# Altium PCB AUTOMATIC_WATER_PUMPS_V1.PcbDoc
Units mm, origin at the board's own origin, x right, y up, seen from the top; angles counter-clockwise.
Board outline 60.96 x 87.63 mm, 2 copper layers (Top Layer, Bottom Layer); 65 components, 65 nets, 234 pads, 0 vias.
Unrouted connection lines stored in the file: 151.
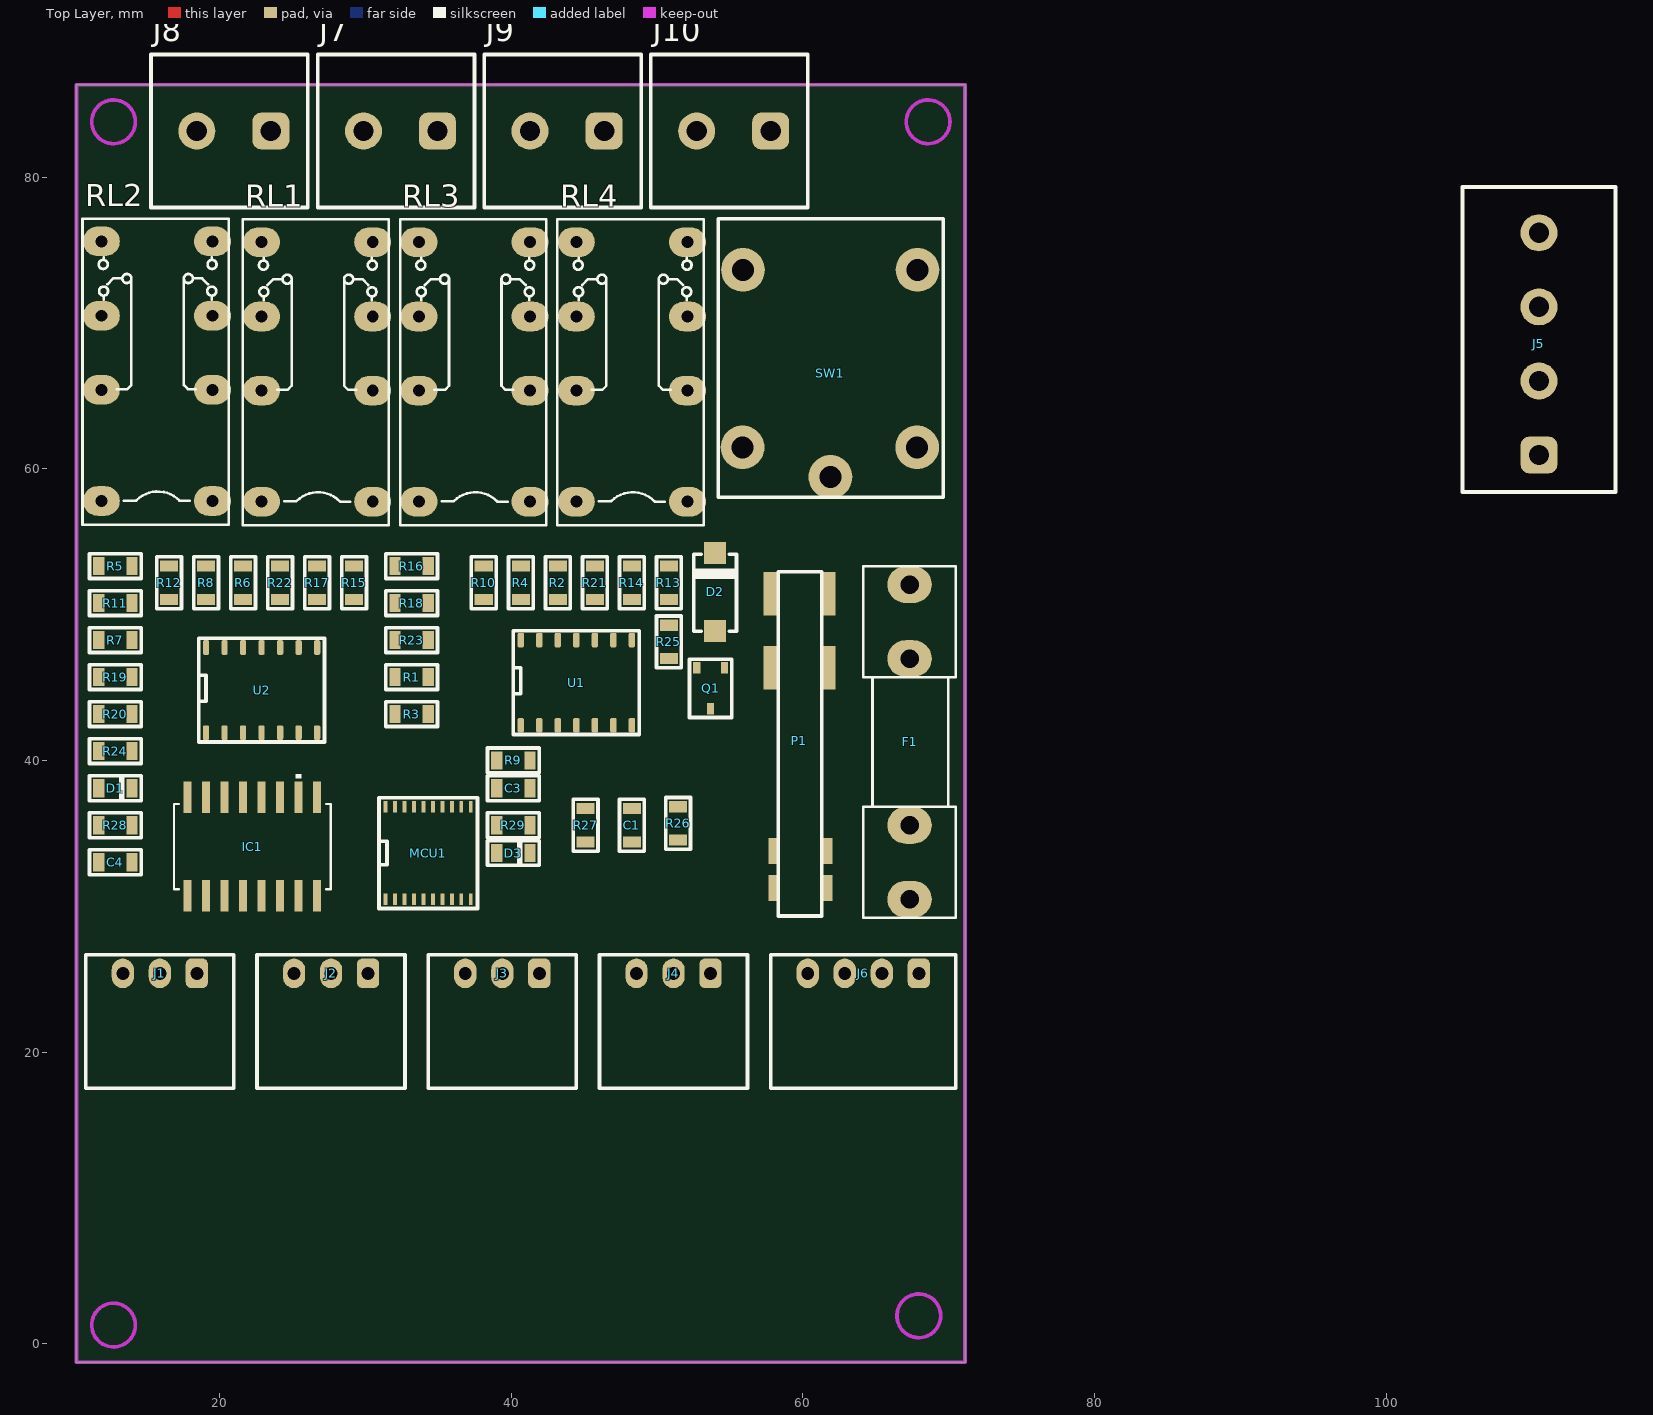
[diagram p0: Top Layer view]
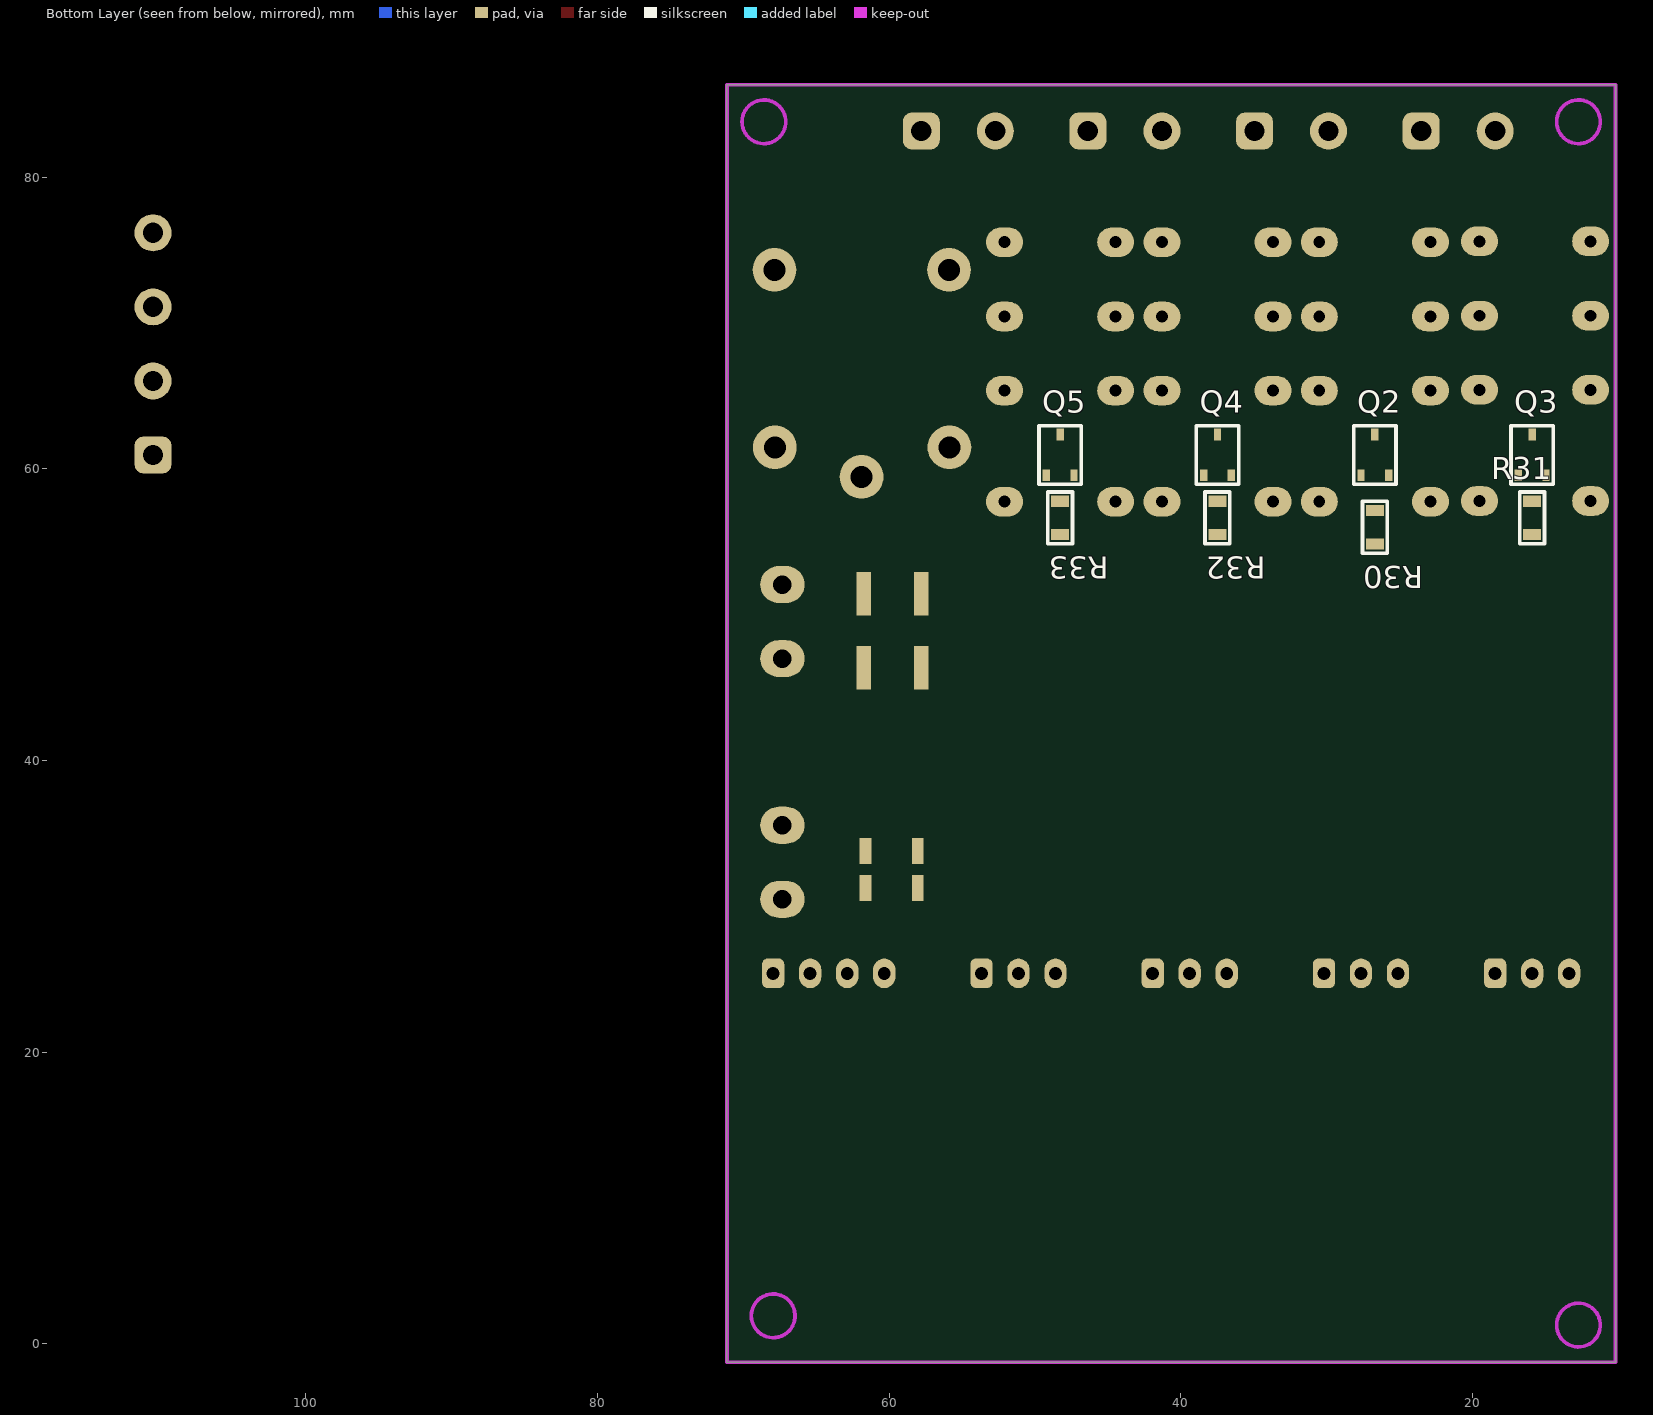
[diagram p1: Bottom Layer view, seen from below]

## Layer stack, top to bottom
Top Solder: solder mask 0.0102, Solder Resist, Dk 3.5
Top Layer: signal copper 0.0356
Dielectric 1: dielectric 0.32, FR-4, Dk 4.8
Bottom Layer: signal copper 0.0356
Bottom Solder: solder mask 0.0102, Solder Resist, Dk 3.5

## Board outline
10.16,-1.27 10.16,86.36 71.12,86.36 71.12,-1.27

## Design rules (kind name [scope] priority, off if disabled: settings)
Clearance [All] p1: gap=0.254 ignorepadtopadclearanceinfootprint=FALSE except(0: Arc-Hole Track-Hole SMDPad-Hole THPad-Hole Via-Hole Fill-Hole Poly-Hole Region-Hole Text-Hole)
PolygonConnect [All] p1: connectstyle=Relief reliefconductorwidth=0.254 reliefentries=4 polygonreliefangle="90 Angle" airgapwidth=0.254
RoutingCorners [All] p1: cornerstyle=Round minsetback=2.54 maxsetback=2.54
RoutingVias [All] p1: holewidth=0.3 width=0.5 viastyle="Through Hole" minholewidth=0.3 minwidth=0.5 maxholewidth=0.3 maxwidth=0.5
SolderMaskExpansion [All] p1: expansion=0.102 istentingtop=FALSE
Width [All] p1: maxlimit=0.2 minlimit=0.2 preferedwidth=0.2
29 further rules are at their usual default settings.

## Components (designator, comment, footprint, x,y, rotation, side; value= is the part's Value field where it differs from the comment)
C1 "102pF" C0805 48.26,35.56 r270 top
C3 "105" C0805 40.132,38.1 r0 top
C4 "103" C0805 12.827,33.02 r0 top
D1 "Blink" L0805RED 12.827,38.1 r0 top
D2 "1N4007" DO-214AC(SMA) 53.975,53.467 r270 top
D3 "Blink" L0805RED 40.132,33.655 r0 top
F1 "Fuse 1" FUSE2 67.485,41.075 r90 top
IC1 "74LS151" SOP16 22.225,34.087 r90 top
J1 "WT1" "JST - XH - Thru (R) - 3Pin - 2.54mm" 15.875,25.4 r180 top
J2 "WT2" "JST - XH - Thru (R) - 3Pin - 2.54mm" 27.622,25.4 r180 top
J3 "WT3" "JST - XH - Thru (R) - 3Pin - 2.54mm" 39.37,25.4 r180 top
J4 "WT4" "JST - XH - Thru (R) - 3Pin - 2.54mm" 51.117,25.4 r180 top
J5 "KF28" HEADER_KF128_4_5.08MM 110.49,68.58 r90 top
J6 "LCD16x2" "JST - XH - Thru (R) - 4Pin - 2.54mm" 64.135,25.4 r180 top
J7 "KF28_2" HEADER_KF128_2_5.08MM 32.385,83.185 r180 top
J8 "KF28_2" HEADER_KF128_2_5.08MM 20.955,83.185 r180 top
J9 "KF28_2" HEADER_KF128_2_5.08MM 43.815,83.185 r180 top
J10 "KF28_2" HEADER_KF128_2_5.08MM 55.245,83.185 r180 top
MCU1 "STM8S003F3P6" TSSOP20_0.65_4.4 34.29,33.655 r90 top
P1 "MODULE_5V_700mA" MODULE_5V_700mA 59.817,46.355 r90 top
Q1 "2N3904" SOT23-3 53.66,44.955 r180 top
Q2 "2N3904" SOT23-3 26.67,60.96 r180 bottom
Q3 "2N3904" SOT23-3 15.875,60.96 r180 bottom
Q4 "2N3904" SOT23-3 37.465,60.96 r180 bottom
Q5 "2N3904" SOT23-3 48.26,60.96 r180 bottom
R1 "10k" R0805 33.147,45.72 r180 top
R2 "10k" R0805 43.18,52.197 r90 top
R3 "10k" R0805 33.147,43.18 r0 top
R4 "10k" R0805 40.64,52.197 r270 top
R5 "10k" R0805 12.827,53.34 r180 top
R6 "10k" R0805 21.59,52.197 r90 top
R7 "10k" R0805 12.827,48.26 r0 top
R8 "10k" R0805 19.05,52.197 r270 top
R9 "10k" R0805 40.132,40.005 r180 top
R10 "10k" R0805 38.1,52.197 r90 top
R11 "10k" R0805 12.827,50.8 r180 top
R12 "10k" R0805 16.51,52.197 r90 top
R13 "10k" R0805 50.8,52.197 r90 top
R14 "10k" R0805 48.26,52.197 r270 top
R15 "10k" R0805 29.21,52.197 r90 top
R16 "10k" R0805 33.147,53.34 r180 top
R17 "10k" R0805 26.67,52.197 r270 top
R18 "10k" R0805 33.147,50.8 r0 top
R19 "10k" R0805 12.827,45.72 r180 top
R20 "10k" R0805 12.827,43.18 r0 top
R21 "10k" R0805 45.72,52.197 r90 top
R22 "10k" R0805 24.13,52.197 r90 top
R23 "10k" R0805 33.147,48.26 r180 top
R24 "10k" R0805 12.827,40.64 r180 top
R25 "10k" R0805 50.8,48.133 r270 top
R26 "10k" R0805 51.435,35.687 r90 top
R27 "10k" R0805 45.085,35.56 r270 top
R28 "10k" R0805 12.827,35.56 r0 top
R29 "10k" R0805 40.132,35.56 r0 top
R30 "10k" R0805 26.67,56.007 r270 bottom
R31 "10k" R0805 15.875,56.642 r270 bottom
R32 "10k" R0805 37.465,56.642 r270 bottom
R33 "10k" R0805 48.26,56.642 r270 bottom
RL1 "RELAY_DPDT_1A" RELAY_DPDT_1A 26.869,66.628 r90 top
RL2 "RELAY_DPDT_1A" RELAY_DPDT_1A 15.875,66.675 r90 top
RL3 "RELAY_DPDT_1A" RELAY_DPDT_1A 37.664,66.628 r90 top
RL4 "RELAY_DPDT_1A" RELAY_DPDT_1A 48.459,66.628 r90 top
SW1 "RELAY_10A" RELAY_10A_5PIN 61.755,67.71 r90 top
U1 "LM324" SOP-14 44.45,45.339 r90 top
U2 "LM324" SOP-14 22.86,44.831 r90 top

## Footprints (in the part's own frame and the unit in brackets; to place one, negate y for a bottom-side part, rotate by r counter-clockwise, add the part's x,y. Pads: shape width x height; smd on the part's side, far side on the other; paste and mask are expansions set on the pad)
C0805 [mil]
  rect 30x48.82 smd: 1(-45,0) 2(45,0)
  silkscreen extent -70,-33 70,33, body extent -39,-24 39,24, height 39
DO-214AC(SMA) [mm]
  rect 1.5x1.5 smd: 1(4.572,0) 2(-0.762,0)
  silkscreen extent -0.67,-1.5 4.61,1.5, body extent -0.67,-1.46 4.61,1.46, height 2.41
FUSE2 [mm]
  oval 2.54x3.048 hole 1.27: 1(-10.595,0.175) 1(-5.515,0.175) 2(5.915,0.175) 2(10.995,0.175)
  silkscreen extent -11.87,-3 12.26,3.35, body extent -11.18,-2.8 11.86,3.4, height 9.6
HEADER_KF128_2_5.08MM [mil]
  rrect50% 100x100 hole 55: 1(-100,0)
  round 100 hole 55: 2(100,0)
  silkscreen extent -200,-207 224,207, body extent -200,-207 224,207, height 563
HEADER_KF128_4_5.08MM [mil]
  rrect50% 100x100 hole 55: 1(-300,0)
  round 100 hole 55: 2(-100,0) 3(100,0) 4(300,0)
  silkscreen extent -400,-207 424,207, body extent -400,-207 424,207, height 563
"JST - XH - Thru (R) - 3Pin - 2.54mm" [mil]
  rrect50% 60x80 hole 35: 1(-100,0)
  oval 60x80 hole 35: 2(0,0) 3(100,0)
  silkscreen extent -200,-50 200,310, body extent -192,-13 192,304, height 230
"JST - XH - Thru (R) - 4Pin - 2.54mm" [mil]
  rrect50% 60x80 hole 35: 1(-150,0)
  oval 60x80 hole 35: 2(-50,0) 3(50,0) 4(150,0)
  silkscreen extent -250,-50 250,310, body extent -242,-13 242,304, height 230
L0805RED [mil]
  rect 30x48.82 smd: 1(-45,0) 2(45,0)
  silkscreen extent -70,-35 70,35, body extent -39,-25 39,25, height 43
MODULE_5V_700mA [mm]
  rect 1.779x0.8 all layers, no hole: 0(-15.108,1.8) 0(-12.568,1.8) 3(-12.568,-1.8) 4(-15.108,-1.8)
  rect 3x1 all layers, no hole: 0(0,2.032) 0(5.08,2.032) 1(5.08,-1.905) 2(0,-1.905)
  silkscreen extent -17.02,-1.48 6.6,1.52
R0805 [mil]
  rect 30x48.82 smd: 1(-45,0) 2(45,0)
  silkscreen extent -70,-33 70,33, body extent -39,-25 40,25, height 18
RELAY_10A_5PIN [mm]
  round 3 hole 1.5: 1(-6.225,5.9) 2(-8.25,-0.125) 3(-6.225,-6.075) 4(5.95,-6.1) 5(5.95,5.875)
  silkscreen extent -9.65,-7.87 9.45,7.58, body extent -9.65,-7.88 9.45,7.62, height 15.3
RELAY_DPDT_1A [mil]
  oval 80x100 hole 32: 1(150.87,157.83) 2(-49.13,157.83) 3(351.87,157.83) 4(150.87,-142.17) 5(-49.13,-142.17) 6(351.87,-142.17) 7(-349.13,-142.17) 8(-349.13,157.83)
  silkscreen extent -413,-186 413,209, body extent -409,-182 410,204, height 484
SOP16 [mil]
  rect 85x22 smd paste+0 mask+0: 1(-133,175) 2(-133,125) 3(-133,75) 4(-133,25) 5(-133,-25) 6(-133,-75) 7(-133,-125) 8(-133,-175) 9(133,-175) 10(133,-125) 11(133,-75) 12(133,-25) 13(133,25) 14(133,75) 15(133,125) 16(133,175)
  silkscreen extent -115,-212 196,212, body extent -161,-206 162,206, height 79
SOP-14 [mm]
  rrect50% 1x0.43 smd: 1(-2.921,3.81) 2(-2.921,2.54) 3(-2.921,1.27) 4(-2.921,0) 5(-2.921,-1.27) 6(-2.921,-2.54) 7(-2.921,-3.81) 8(2.921,-3.81) 9(2.921,-2.54) 10(2.921,-1.27) 11(2.921,0) 12(2.921,1.27) 13(2.921,2.54) 14(2.921,3.81)
  silkscreen extent -3.56,-4.32 3.56,4.32, body extent -3,-4.28 3,4.28, height 1.8
SOT23-3 [mm]
  rect 0.5x0.8 smd: 1(-0.95,-1.4) 2(0.95,-1.4) 3(0,1.4)
  silkscreen extent -1.45,-2 1.45,2, body extent -1.45,-1.4 1.45,1.4, height 1.3
TSSOP20_0.65_4.4 [mil]
  rect 30x10 smd: 1(-125,115.16) 2(-125,89.57) 3(-125,63.98) 4(-125,38.39) 5(-125,12.8) 6(-125,-12.8) 7(-125,-38.39) 8(-125,-63.98) 9(-125,-89.57) 10(-125,-115.16) 11(125,-115.16) 12(125,-89.57) 13(125,-63.98) 14(125,-38.39) 15(125,-12.8) 16(125,12.8) 17(125,38.39) 18(125,63.98) 19(125,89.57) 20(125,115.16)
  silkscreen extent -150,-133 150,133, body extent -124,-128 124,128, height 43

## Part data
C1: library part Capacitors(SMD)
C3 C4: library part C0805
D1 D3: library part LED0805
D2: library part "Diode 1N4007-DO214AC(SMA)"
IC1: "8-input multiplexer"
J1 J2 J3 J4: library part "JST - XH - Thru (R) - 3Pin - 2.54mm"
J5: library part HEADER_KF128_4_5.08MM
J6: library part "JST - XH - Thru (R) - 4Pin - 2.54mm"
J7 J8 J9 J10: library part HEADER_KF128_2_5.08MM
Q1 Q2 Q3 Q4 Q5: library part "2N3904 (SOT-23)"
R1 R2 R3 R4 R5 R6 R7 R8 R9 R10 R11 R12 R13 R14 R15 R16 R17 R18 R19 R20 R21 R22 R23 R24 R25 R26 R27 R28 R29 R30 R31 R32 R33: library part "Resistor SMD"
U1 U2: "Quad-Operational Amp"
F1: LatestRevisionDate=17-Jul-2002, LatestRevisionNote="Re-released for DXP Platform.", PackageDescription="Thru-Hole; 2 Leads", PackageReference=PIN-W2/E2.8, Published=8-Jun-2000, Publisher="Altium Limited"

## Nets (pads, with @x,y where several pads share a name; then routed paths per layer and width w, separated by ;. In a path a pad name is that pad's centre, name@x,y a point inside that pad or via, vN(x,y) a via of type N, cw(c..) or ccw(c..) an arc to the next point about the centre after c; other vN are vias at no path point)
AC1: J5.1 J5.3 P1.2 RL1.5 RL2.5 RL3.5 RL4.5
AC2: F1.1 P1.1 RL1.2 RL2.2 RL3.2 RL4.2 SW1.2
GND: C1.1 C3.2 C4.1 D1.2 D2.1 D3.2 IC1.8 J6.4 MCU1.7 P1.4 Q1.2 Q2.2 Q3.2 Q4.2 Q5.2 R9.1 R10.1 R11.1 R12.1 R21.1 R22.1 R23.1 R24.1 R26.2 U1.11 U2.11
NetC1_2: C1.2 MCU1.8
NetD1_1: D1.1 R28.1
NetD2_2: D2.2 Q1.3 SW1.1
NetD3_1: D3.1 R29.1
NetF1_2: F1.2 J5.2
NetIC1_5: IC1.5 MCU1.20
NetIC1_7: IC1.7 R26.1
NetIC1_9: IC1.9 MCU1.13
NetIC1_10: IC1.10 MCU1.14
NetIC1_11: IC1.11 MCU1.15
NetJ1_1: J1.1 U2.2
NetJ1_3: J1.3 U2.6
NetJ2_1: J2.1 U2.9
NetJ2_3: J2.3 U2.13
NetJ3_1: J3.1 U1.2
NetJ3_3: J3.3 U1.6
NetJ4_1: J4.1 U1.9
NetJ4_3: J4.3 U1.13
NetJ5_4: J5.4 SW1.5
NetJ6_1: J6.1 MCU1.12
NetJ6_2: J6.2 MCU1.11
NetJ7_1: J7.1 RL1.6
NetJ7_2: J7.2 RL1.3
NetJ8_1: J8.1 RL2.6
NetJ8_2: J8.2 RL2.3
NetJ9_1: J9.1 RL3.6
NetJ9_2: J9.2 RL3.3
NetJ10_1: J10.1 RL4.6
NetJ10_2: J10.2 RL4.3
NetMCU1_4: MCU1.4 R27.2
NetMCU1_17: MCU1.17 R28.2
NetMCU1_19: MCU1.19 R25.2
NetQ1_1: Q1.1 R25.1
NetQ2_1: Q2.1 R30.1
NetQ2_3: Q2.3 RL1.7
NetQ3_1: Q3.1 R31.1
NetQ3_3: Q3.3 RL2.7
NetQ4_1: Q4.1 R32.1
NetQ4_3: Q4.3 RL3.7
NetQ5_1: Q5.1 R33.1
NetQ5_3: Q5.3 RL4.7
NetR1_2: R1.2 R3.1 R9.2 U1.3
NetR2_2: R2.2 R4.1 R10.2 U1.10
NetR5_2: R5.2 R7.1 R11.2 U2.3
NetR6_2: R6.2 R8.1 R12.2 U2.10
NetR13_2: R13.2 R14.1 R21.2 U1.12
NetR15_2: R15.2 R17.1 R22.2 U2.12
NetR16_2: R16.2 R18.1 R23.2 U1.5
NetR19_2: R19.2 R20.1 R24.2 U2.5
RL1: MCU1.1 R32.2
RL2: MCU1.2 R33.2
RL3: MCU1.3 R31.2
RL4: MCU1.5 R30.2
S1: IC1.4 R5.1 U2.1
S2: IC1.3 R19.1 U2.7
S3: IC1.2 R6.1 U2.8
S4: IC1.1 R15.1 U2.14
S5: IC1.15 R1.1 U1.1
S6: IC1.14 R16.1 U1.7
S7: IC1.13 R2.1 U1.8
S8: IC1.12 R13.1 U1.14
VCC: C3.1 C4.2 IC1.16 J1.2 J2.2 J3.2 J4.2 J6.3 MCU1.9 P1.3 R3.2 R4.2 R7.2 R8.2 R14.2 R17.2 R18.2 R20.2 R27.1 R29.2 RL1.8 RL2.8 RL3.8 RL4.8 SW1.3 U1.4 U2.4
pads on no net: IC1.6 MCU1.6 MCU1.10 MCU1.16 MCU1.18 P1.0 RL1.1 RL1.4 RL2.1 RL2.4 RL3.1 RL3.4 RL4.1 RL4.4 SW1.4

## Keep-outs
Keep-Out Layer:
  circle w0.254: c68.58,83.82 r1.5
  circle w0.254: c12.7,1.27 r1.5
  circle w0.254: c67.945,1.905 r1.5
  circle w0.254: c12.7,83.82 r1.5
  lines w0.254: 10.16,-1.27 71.12,-1.27 71.12,86.36 10.16,86.36 10.16,-1.27

## Dimensions
71.12,86.36 to 71.12,-1.27 on Mechanical 15
10.16,-1.27 to 71.12,-1.27 on Mechanical 15